# Altium PCB PCB1.pcbdoc
Units mil, origin at the board's own origin, x right, y up, seen from the top; angles counter-clockwise.
Board outline 2531.19 x 3324.76 mil, 2 copper layers (Top Layer, Bottom Layer); 18 components, 4 nets, 52 pads, 8 vias.
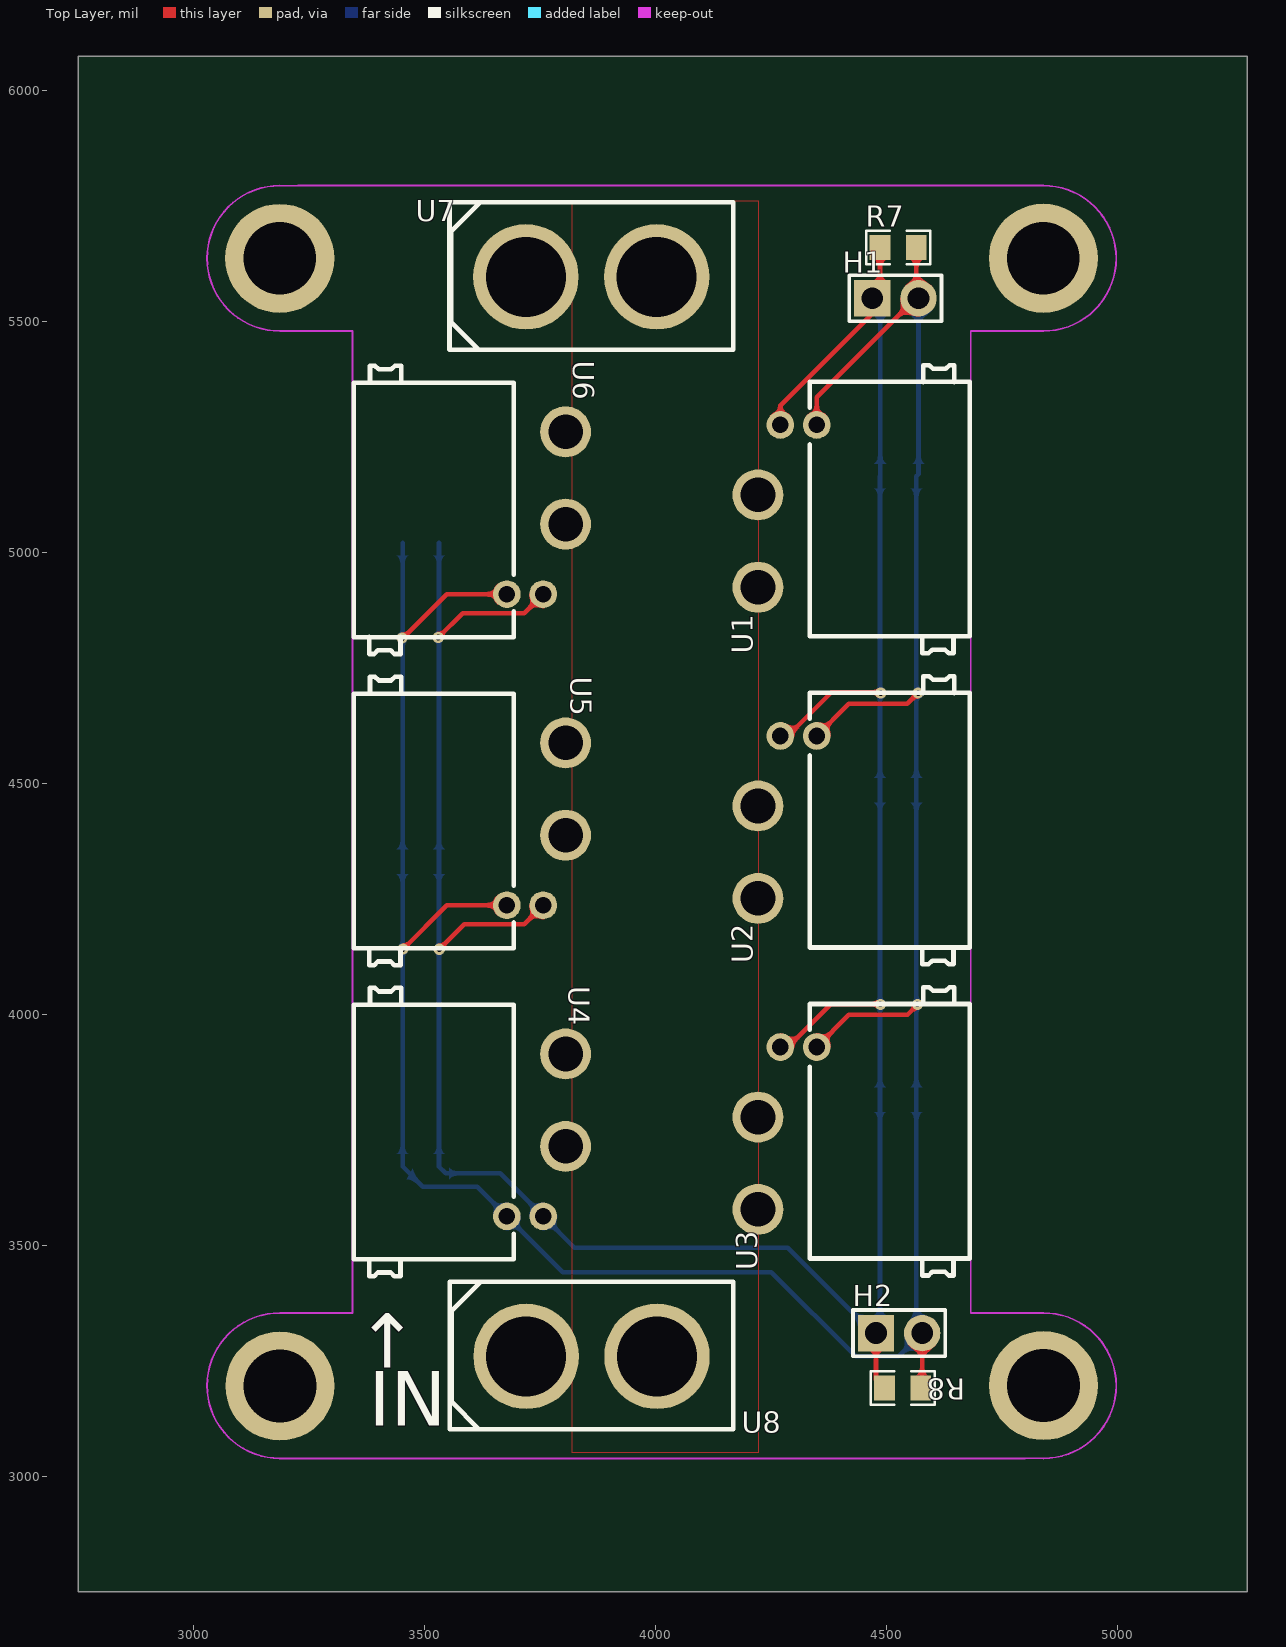
[diagram p0: Top Layer view]
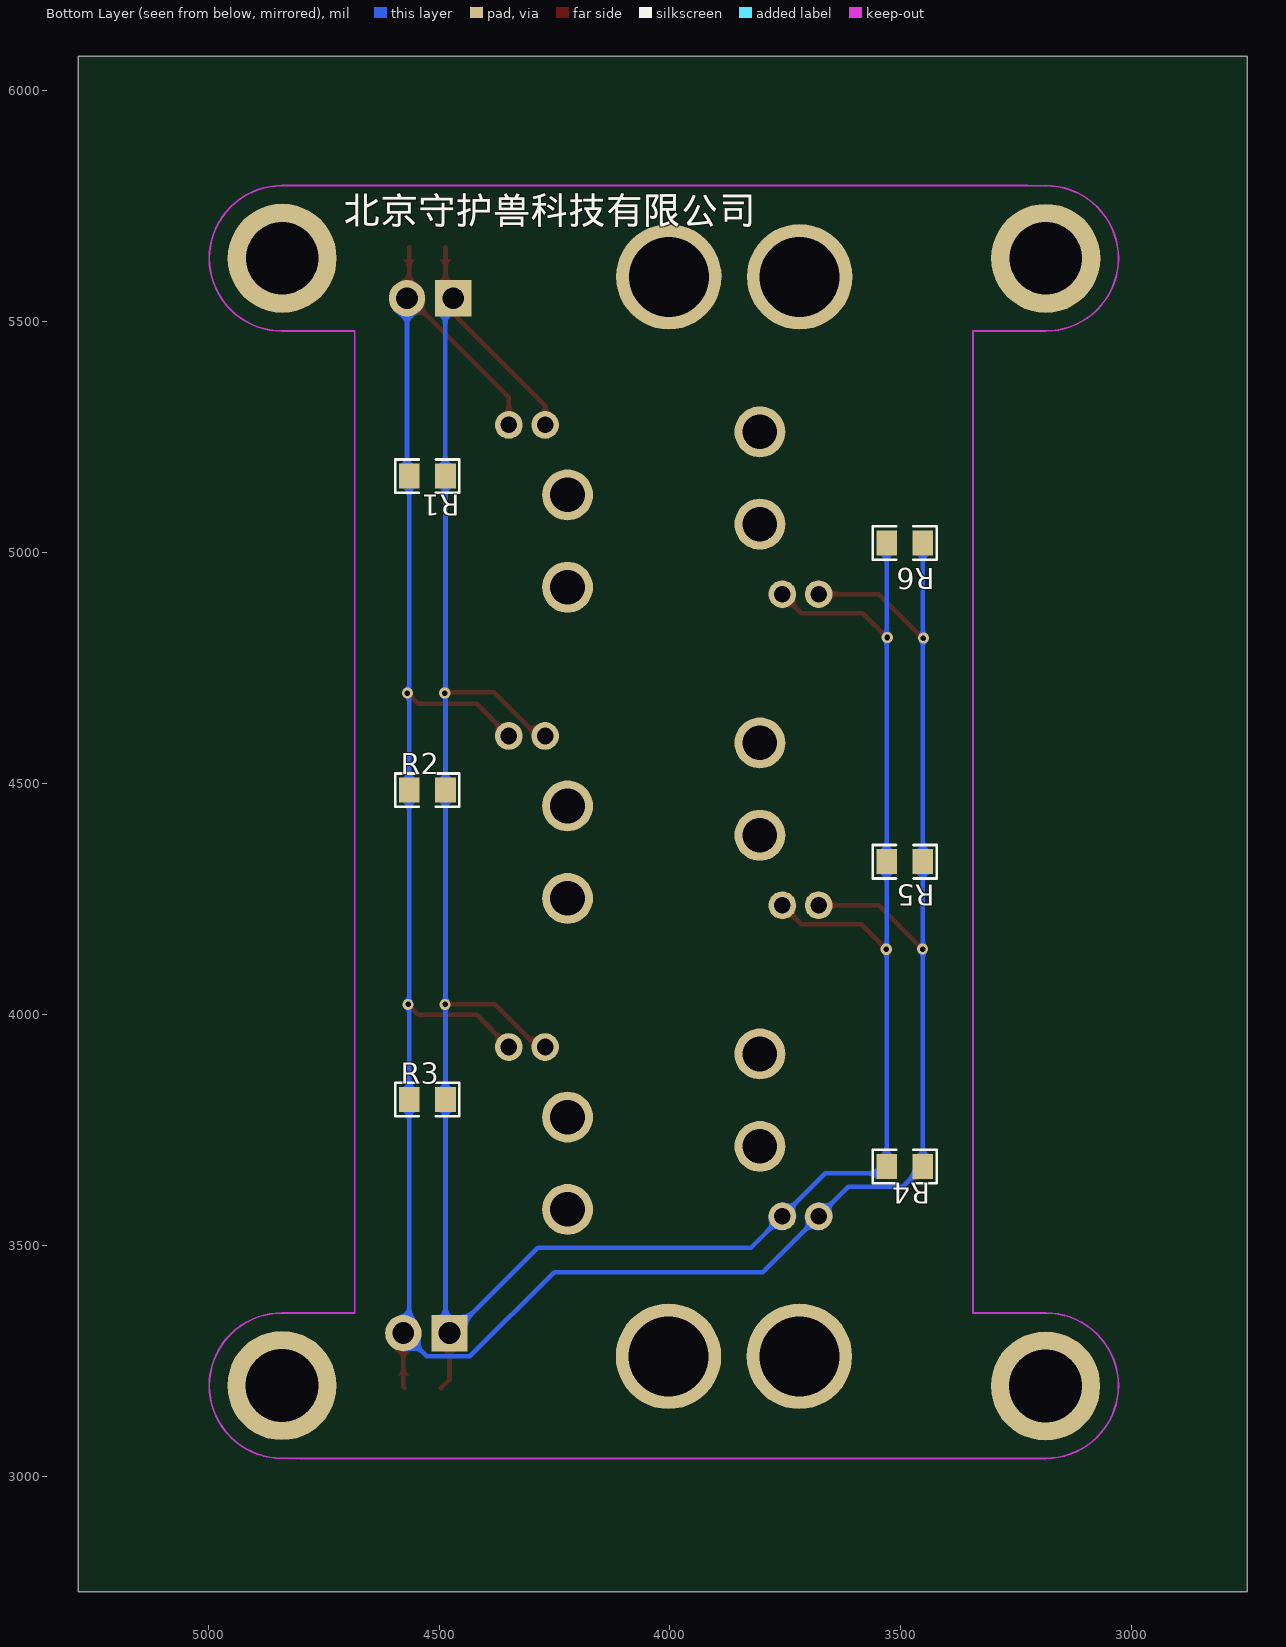
[diagram p1: Bottom Layer view, seen from below]

## Layer stack, top to bottom
Top Layer: signal copper (thickness not stored)
Dielectric: dielectric 12.6, FR-4, Dk 4.8
Bottom Layer: signal copper (thickness not stored)

## Board outline
5281.19,2750 2750,2750 2750,6074.76 5281.19,6074.76

## Design rules (kind name [scope] priority, off if disabled: settings)
Clearance copperThickness1oz [All] p1: gap=7 ignorepadtopadclearanceinfootprint=FALSE except(4: Track-Track; 6: Track-SMDPad SMDPad-SMDPad Track-THPad SMDPad-THPad THPad-THPad Track-Via SMDPad-Via THPad-Via Via-Via Track-Fill SMDPad-Fill THPad-Fill Via-Fill Fill-Fill SMDPad-Region THPad-Region Via-Region Fill-Region Region-Region Track-Poly SMDPad-Poly THPad-Poly Via-Poly Fill-Poly Poly-Poly Track-Text SMDPad-Text THPad-Text Via-Text Fill-Text Region-Text Poly-Text Text-Text Track-Sheet SMDPad-Sheet THPad-Sheet Via-Sheet Fill-Sheet Region-Sheet Poly-Sheet Text-Sheet Track-Hole SMDPad-Hole THPad-Hole Via-Hole Fill-Hole Region-Hole Poly-Hole Text-Hole Sheet-Hole; 11.8: Track-Region Region-Poly)
Clearance copperThickness2oz [All] p1: gap=7 ignorepadtopadclearanceinfootprint=FALSE except(6: Track-SMDPad SMDPad-SMDPad Track-THPad SMDPad-THPad THPad-THPad Track-Via SMDPad-Via THPad-Via Via-Via Track-Fill SMDPad-Fill THPad-Fill Via-Fill Fill-Fill SMDPad-Region THPad-Region Via-Region Fill-Region Region-Region Track-Poly SMDPad-Poly THPad-Poly Via-Poly Fill-Poly Poly-Poly Track-Text SMDPad-Text THPad-Text Via-Text Fill-Text Region-Text Poly-Text Text-Text Track-Sheet SMDPad-Sheet THPad-Sheet Via-Sheet Fill-Sheet Region-Sheet Poly-Sheet Text-Sheet Track-Hole SMDPad-Hole THPad-Hole Via-Hole Fill-Hole Region-Hole Poly-Hole Text-Hole Sheet-Hole; 8: Track-Track; 11.8: Track-Region Region-Poly)
DiffPairsRouting differentialPair [All] p1: maxuncoupledlength=236.2205 maxlimit=5.9843 mostfreqgap=5.9843 toplayer_minwidth=5 toplayer_prefwidth=10 toplayer_maxwidth=100 bottomlayer_minwidth=5 bottomlayer_prefwidth=10 bottomlayer_maxwidth=100
PasteMaskExpansion pasteMaskExpansion [All] p1:
PlaneConnect innerPlane [All] p1: planeconnectstyle=Relief reliefexpansion=20 reliefentries=4 reliefconductorwidth=10 reliefairgap=10
PolygonConnect copperRegion [All] p1: connectstyle=Direct reliefentries=4 reliefconductorwidth=10 polygonreliefangle="90 Angle" airgapwidth=10
RoutingVias viaSize [All] p1: viastyle="Through Hole" holewidth=12.0078 minholewidth=11.811 maxholewidth=248.0314 width=24.0158 minwidth=19.685 maxwidth=393.7008
SolderMaskExpansion solderMaskExpansion [All] p1: useseparateexpansions=TRUE expansion=2.0079 expansionbottom=2.0079
Width copperThickness1oz [All] p1: maxlimit=157 minlimit=5 preferedwidth=10
Width copperThickness2oz [All] p1: maxlimit=157 minlimit=8 preferedwidth=10

## Components (designator, comment, footprint, x,y, rotation, side; value= is the part's Value field where it differs from the comment)
H1 "PZ254V-11-02P" HDR-TH_2P-P2.54-V-M 4519.33,5550.77 r0 top
H2 "PZ254V-11-02P" HDR-TH_2P-P2.54-V-M 4527.35,3309.93 r0 top
R1 "0805W8F1200T5E" R0805 4525.4,5165.77 r180 bottom
R2 "0805W8F1200T5E" R0805 4525.4,4485.77 r180 bottom
R3 "0805W8F1200T5E" R0805 4525.4,3815.76 r180 bottom
R4 "0805W8F1200T5E" R0805 3491.62,3670.76 r0 bottom
R5 "0805W8F1200T5E" R0805 3491.62,4330.77 r0 bottom
R6 "0805W8F1200T5E" R0805 3491.62,5020.77 r0 bottom
R7 "0805W8F1200T5E" R0805 4525.4,5660.77 r180 top
R8 "0805W8F1200T5E" R0805 4535.2,3191.16 r180 top
U1 "XT30PW(2+2)-M.G.B" CONN-TH_4P-XT30PW-M 4285.4,5100.77 r90 top
U2 "XT30PW(2+2)-M.G.B" CONN-TH_4P-XT30PW-M 4285.4,4427.18 r90 top
U3 "XT30PW(2+2)-M.G.B" CONN-TH_4P-XT30PW-M 4285.4,3753.6 r90 top
U4 "XT30PW(2+2)-M.G.B" CONN-TH_4P-XT30PW-M 3741.62,3738.6 r270 top
U5 "XT30PW(2+2)-M.G.B" CONN-TH_4P-XT30PW-M 3741.62,4412.18 r270 top
U6 "XT30PW(2+2)-M.G.B" CONN-TH_4P-XT30PW-M 3741.62,5085.77 r270 top
U7 "XT60" CONN-TH_XT60 3860.86,5597.09 r0 top
U8 "XT60" CONN-TH_XT60 3861.44,3259.64 r0 top

## Footprints (in the part's own frame and the unit in brackets; to place one, negate y for a bottom-side part, rotate by r counter-clockwise, add the part's x,y. Pads: shape width x height; smd on the part's side, far side on the other; paste and mask are expansions set on the pad)
CONN-TH_4P-XT30PW-M [mil]
  round 110.24 hole 74.8: 1(-175.79,63.59) 2(24.21,63.59)
  round 60 hole 36: 3(175.79,15.15) 4(175.79,-63.59)
  silkscreen extent -319,-395 305,-49
CONN-TH_XT60 [mm]
  round 5.8 hole 4.4: 1(-3.6,0) 2(3.6,0)
  silkscreen extent -7.8,-4 7.8,4.1
HDR-TH_2P-P2.54-V-M [mm]
  rect 2x2 hole 1.2: 1(-1.27,0)
  round 2 hole 1.2: 2(1.27,0)
  silkscreen extent -2.54,-1.27 2.54,1.27
R0805 [mm]
  rect 1.133x1.377 smd: 1(-1,0) 2(1,0)
  silkscreen extent -1.76,-0.92 1.76,0.92

## Free pads (board coordinates)
  round 236.22 hole 157.48: 5(3186.29,5637.11) 5(3186.71,3195.41) 5(4839.69,5637.33) 5(4840.11,3196.43)

## Via types
v1: diameter 24.02, hole 12.01, Top Layer to Bottom Layer, 8 vias

## Nets (pads, with @x,y where several pads share a name; then routed paths per layer and width w, separated by ;. In a path a pad name is that pad's centre, name@x,y a point inside that pad or via, vN(x,y) a via of type N, cw(c..) or ccw(c..) an arc to the next point about the centre after c; other vN are vias at no path point)
CANH: 
CANL: H1.1 H2.1 R1.2 R2.2 R3.2 R4.2 R5.2 R6.2 R7.2 R8.2 U1.3 U2.3 U3.3 U4.3 U5.3 U6.3 | length 6340.7
  Top Layer w10: v1(3529.45,4816.22) 3582.2,4868.97 3715.77,4868.97 U6.3 ; v1(3531.65,4141.17) 3585.87,4195.39 3715.77,4195.39 U5.3 ; U3.3 4286.46,3929.39 4379.51,4022.44 4486.28,4022.44 v1(4486.75,4021.96) ; U2.3 4286.46,4602.97 4380.93,4697.44 4485.87,4697.44 v1(4487.55,4695.76) ; U1.3 4270.24,5318.46 4469.33,5517.55 H1.1 4486.03,5567.46 R7.2 ; H2.1 4477.35,3209.64 R8.2
  Bottom Layer w10: R6.2 R5.2 R4.2 3545.77,3655.98 3663.6,3655.98 U4.3 3824.49,3495.09 4286.03,3495.09 4471.19,3309.93 H2.1 4486.03,3318.6 R3.2 R2.2 R1.2 4486.54,5166.28 4486.54,5533.56 H1.1
GND: U1.2 U2.2 U3.2 U4.2 U5.2 U6.2 U7.1 U8.1
VCC: U1.1 U2.1 U3.1 U4.1 U5.1 U6.1 U7.2 U8.2
pads on no net: H1.2 H2.2 R1.1 R2.1 R3.1 R4.1 R5.1 R6.1 R7.1 R8.1 U1.4 U2.4 U3.4 U4.4 U5.4 U6.4
copper on no net: | length 6560.7
  Top Layer w10: v1(3451.19,4814.7) 3452.19,4814.7 3547.47,4909.97 3678.03,4909.97 ; v1(3453.09,4141.48) 3548.11,4236.49 3677.93,4236.49 3678.03,4236.39 ; 4348.98,3929.39 4418.55,3998.96 4545.63,3998.96 4567.14,4020.47 v1(4567.14,4021.96) ; 4348.98,4602.97 4418.76,4672.75 4545.39,4672.75 v1(4568.4,4695.76) ; 4348.98,5276.56 4348.98,5336.12 4563.63,5550.77 4569.33,5550.77 4564.77,5555.33 4564.77,5660.77 ; 4574.57,3191.16 4577.35,3193.94 4577.35,3309.93
  Bottom Layer w10: 3452.25,5020.77 3452.25,4330.77 3452.25,3670.76 3496.1,3626.91 3613.93,3626.91 3678.03,3562.81 3798.73,3442.11 4250.9,3442.11 4433.43,3259.58 4527,3259.58 4577.35,3309.93 4564.77,3322.52 4564.77,3815.76 4564.77,4485.77 4564.77,5165.77 4569.33,5170.33 4569.33,5550.77

## Polygon pours and split planes (outlines as drawn)
GND on Top Layer (solid, remove dead copper, pour order 14): 3818.26,3051.89 4223.57,3051.89 4223.57,5760.29 3818.26,5760.29
GND on Top Layer (solid, remove dead copper, pour order 16): 3008.22,3000 5027.08,3000 5027.08,5820.64 3008.22,5820.64
GND on Bottom Layer (solid, remove dead copper, pour order 22): 3000,3024.67 5031.19,3024.67 5031.19,5824.76 3000,5824.76
VCC on Bottom Layer (solid, remove dead copper, pour order 18): 3887.06,5597.4 3887.58,5597.4 3887.58,5597.93
VCC on Bottom Layer (solid, remove dead copper, pour order 20): 3887.58,5597.93 3887.58,5611.59 3889.77,5613.78 3889.77,5600.11
VCC on Top Layer (solid, remove dead copper): 3887.58,5726.54 4118.47,5726.54 4118.47,3133.74 3887.58,3133.74
VCC on Top Layer (solid, remove dead copper, pour order 2): 4096.23,3631.66 4222.02,3631.66 4223.2,3632.84 4223.2,3523.23 4221.98,3522.01 4096.23,3522.01 4095.92,3522.31 4096.23,3522.31
VCC on Top Layer (solid, remove dead copper, pour order 4): 3747.49,3972.21 3930.05,3969.26 3931.23,3970.44 3931.23,3860.83 3930.02,3859.61 3808.28,3859.45 3805.88,3859.45 3748.28,3861.06
VCC on Top Layer (solid, remove dead copper, pour order 6): 4102.28,4306.33 4222.17,4307.12 4272.53,4306.25 4275.18,4196.03 4228.03,4196.68 4102.28,4196.68 4101.98,4196.98 4102.28,4196.98
VCC on Top Layer (solid, remove dead copper, pour order 8): 3745.54,4642.37 3929.03,4642.37 3930.21,4643.55 3930.21,4533.93 3928.99,4532.72 3745.54,4532.81
VCC on Top Layer (solid, remove dead copper, pour order 10): 4104.34,4979.44 4277.96,4978.83 4279.57,4869.46 4230.09,4869.78 4104.34,4869.78 4104.03,4870.09 4104.34,4870.09
VCC on Top Layer (solid, remove dead copper, pour order 12): 3755.74,5318.75 3925.94,5318.56 3927.12,5319.74 3927.12,5210.13 3925.91,5208.91 3755.74,5208.53

## Keep-outs
Board Outline Layer:
  lines w3.94: 3185.32,3038.69 3225.74,3038.83 3422.59,3038.83 4603.69,3038.83 4800.54,3038.83 4840.41,3038.86 ; 3185.39,5794.47 3225.74,5794.73 3422.59,5794.73 4603.69,5794.73 4800.54,5794.73 4840.41,5794.86 ; 3186.37,3038.83 cw(c3186.37,3196.31) 3186.37,3353.79 3343.85,3353.79 3343.85,5479.77 3186.37,5479.77 cw(c3186.37,5637.25) 3186.37,5794.73 ; 3225.74,5479.94 3225.74,5480.03 ; 4839.91,3038.83 ccw(c4839.91,3196.31) 4839.91,3353.79 4682.43,3353.79 4682.43,5479.77 4839.91,5479.77 ccw(c4839.91,5637.25) 4839.91,5794.73

## Other copper
Top Layer:
  region net CANL: 4491.03,5605.14 4481.03,5605.14 cw(c4462.28,5605.14) 4473.53,5590.14 4498.53,5590.14 cw(c4509.78,5605.14)
  region: 4525.05,5519.25 4532.12,5512.18 4532.48,5512.53 4532.87,5512.85 4533.28,5513.15 4533.7,5513.42 4534.14,5513.68 4534.6,5513.91 4535.57,5514.31 4536.6,5514.64 4537.69,5514.89 4538.83,5515.08 4540.02,5515.19 4541.89,5515.27 4543.84,5515.22 4546.56,5515.01 4550.78,5514.44 4562.8,5512.26 4566.7,5511.69 4569.09,5511.48 4570.76,5511.44 4571.8,5511.47 4530.04,5553.23 4529.95,5550.42 4530.03,5547.14 4530.39,5542.94 4531.19,5536.03 4531.31,5534.07 4531.31,5532.63 4531.23,5531.21 4531.12,5530.27 4530.96,5529.34 4530.75,5528.41 4530.47,5527.47 4530.13,5526.54 4529.72,5525.6 4529.24,5524.66 4528.68,5523.7 4528.03,5522.74 4527.3,5521.76 4526.02,5520.27
  region: 4569.77,5604.36 4559.77,5604.36 4559.7,5602.33 4559.51,5600.47 4559.32,5599.31 4559.07,5598.22 4558.78,5597.19 4558.44,5596.21 4558.05,5595.28 4557.62,5594.4 4557.15,5593.57 4556.63,5592.77 4556.08,5592 4555.19,5590.9 4554.22,5589.85 4552.81,5588.5 4548.86,5585.17 4544.45,5581.46 4542.14,5579.28 4540.27,5577.33 4539.81,5576.81 4598.86,5576.81 4598.14,5577.58 4596.91,5578.74 4595.03,5580.3 4591.82,5582.65 4581.59,5589.55 4578.13,5592.12 4576.02,5593.87 4574.58,5595.21 4573.29,5596.58 4572.52,5597.51 4571.83,5598.44 4571.23,5599.4 4570.72,5600.36 4570.31,5601.34 4570.15,5601.84 4570.01,5602.33 4569.91,5602.84 4569.83,5603.34 4569.78,5603.85
  region net CANL: 4310.77,4620.21 4303.7,4627.28 4303.33,4626.93 4302.95,4626.61 4302.55,4626.33 4302.14,4626.07 4301.73,4625.84 4301.3,4625.64 4300.86,4625.47 4300.4,4625.32 4299.94,4625.2 4299.47,4625.11 4298.5,4624.98 4297.49,4624.94 4296.45,4624.99 4295.37,4625.11 4294.27,4625.29 4292.57,4625.68 4290.24,4626.38 4286,4627.92 4278.01,4631.02 4275.61,4631.81 4273.85,4632.29 4272.14,4632.66 4271.02,4632.82 4269.94,4632.92 4268.88,4632.93 4268.36,4632.91 4300.18,4601.09 4300.32,4602.42 4300.56,4603.74 4300.9,4605.05 4301.32,4606.36 4301.83,4607.65 4302.72,4609.56 4303.76,4611.42 4304.93,4613.23 4306.62,4615.54 4308.43,4617.72 4310.3,4619.73
  region: 4381.4,4628.32 4374.33,4635.39 4373.04,4634.18 4372.21,4633.5 4371.41,4632.9 4370.62,4632.38 4369.85,4631.95 4369.1,4631.59 4368.35,4631.29 4367.62,4631.07 4366.89,4630.9 4366.17,4630.79 4365.44,4630.73 4364.72,4630.71 4364,4630.74 4362.9,4630.84 4361.4,4631.09 4356.51,4632.16 4354.2,4632.58 4352.2,4632.83 4350.6,4632.94 4348.9,4632.98 4347.1,4632.91 4378.92,4601.09 4378.99,4602.89 4378.95,4604.59 4378.78,4606.71 4378.51,4608.67 4377.89,4611.8 4377.03,4615.77 4376.85,4616.89 4376.75,4617.99 4376.72,4618.71 4376.74,4619.43 4376.8,4620.16 4376.91,4620.88 4377.08,4621.61 4377.3,4622.34 4377.59,4623.09 4377.96,4623.84 4378.39,4624.61 4378.91,4625.4 4379.51,4626.2 4380.19,4627.03
  region net CANL: 4310.77,3946.62 4303.7,3953.69 4303.33,3953.35 4302.95,3953.03 4302.55,3952.74 4302.14,3952.49 4301.73,3952.26 4301.3,3952.06 4300.86,3951.89 4300.4,3951.74 4299.94,3951.62 4299.47,3951.52 4298.5,3951.4 4297.49,3951.36 4296.45,3951.4 4295.37,3951.52 4294.27,3951.71 4292.57,3952.1 4290.24,3952.79 4286,3954.34 4278.01,3957.44 4275.61,3958.23 4273.85,3958.71 4272.14,3959.07 4271.02,3959.24 4269.94,3959.33 4268.88,3959.35 4268.36,3959.33 4300.18,3927.51 4300.32,3928.83 4300.56,3930.15 4300.9,3931.47 4301.32,3932.77 4301.83,3934.07 4302.72,3935.97 4303.76,3937.84 4304.93,3939.65 4306.62,3941.96 4308.43,3944.13 4310.3,3946.15
  region: 4381.4,3954.73 4374.33,3961.8 4373.04,3960.6 4372.21,3959.91 4371.41,3959.31 4370.62,3958.8 4369.85,3958.36 4369.1,3958 4368.35,3957.71 4367.62,3957.48 4366.89,3957.31 4366.17,3957.2 4365.44,3957.14 4364.72,3957.13 4364,3957.15 4362.9,3957.26 4361.4,3957.5 4356.51,3958.57 4354.2,3958.99 4352.2,3959.24 4350.6,3959.36 4348.9,3959.39 4347.1,3959.33 4378.92,3927.51 4378.99,3929.31 4378.95,3931.01 4378.78,3933.12 4378.51,3935.09 4377.89,3938.22 4377.03,3942.19 4376.85,3943.31 4376.75,3944.4 4376.72,3945.13 4376.74,3945.85 4376.8,3946.57 4376.91,3947.3 4377.08,3948.02 4377.3,3948.76 4377.59,3949.5 4377.96,3950.26 4378.39,3951.03 4378.91,3951.81 4379.51,3952.62 4380.19,3953.45
  region net CANL: 3724.36,4211.04 3731.43,4203.97 3732.71,4205.18 3733.54,4205.87 3734.35,4206.46 3735.13,4206.98 3735.9,4207.41 3736.66,4207.78 3737.4,4208.07 3738.14,4208.3 3738.86,4208.46 3739.59,4208.58 3740.31,4208.64 3741.03,4208.65 3741.76,4208.62 3742.85,4208.52 3744.35,4208.27 3749.24,4207.21 3751.55,4206.79 3753.55,4206.53 3755.15,4206.42 3756.85,4206.39 3758.65,4206.45 3726.83,4238.27 3726.77,4236.47 3726.8,4234.77 3726.97,4232.65 3727.24,4230.69 3727.87,4227.56 3728.73,4223.59 3728.9,4222.47 3729.01,4221.37 3729.03,4220.65 3729.02,4219.93 3728.96,4219.21 3728.85,4218.48 3728.68,4217.75 3728.45,4217.02 3728.16,4216.28 3727.8,4215.52 3727.36,4214.75 3726.85,4213.96 3726.25,4213.16 3725.56,4212.33
  region: 3637.19,4241.49 3637.19,4231.49 3638.96,4231.43 3640.04,4231.33 3641.03,4231.19 3641.95,4230.99 3642.81,4230.76 3643.6,4230.48 3644.33,4230.15 3645.01,4229.79 3645.65,4229.39 3646.23,4228.96 3646.79,4228.49 3647.3,4227.99 3647.8,4227.45 3648.49,4226.6 3649.37,4225.36 3652.06,4221.12 3653.39,4219.18 3654.63,4217.58 3655.68,4216.36 3656.86,4215.13 3658.19,4213.89 3658.19,4258.89 3656.88,4257.67 3655.71,4256.45 3654.33,4254.85 3653.14,4253.27 3651.13,4250.27 3649.14,4247.24 3648.47,4246.33 3647.77,4245.48 3647.27,4244.95 3646.75,4244.46 3646.19,4243.99 3645.6,4243.56 3644.97,4243.17 3644.28,4242.81 3643.55,4242.49 3642.76,4242.22 3641.91,4241.98 3641,4241.79 3640.01,4241.65 3638.94,4241.55
  region net CANL: 4481.03,5618.66 4491.03,5618.66 cw(c4509.78,5618.66) 4498.53,5633.66 4473.53,5633.66 cw(c4462.28,5618.66)
  region: 4559.77,5618.66 4569.77,5618.66 cw(c4588.52,5618.66) 4577.27,5633.66 4552.27,5633.66 cw(c4541.02,5618.66)
  region net CANL: 3724.36,4884.63 3731.43,4877.56 3732.71,4878.76 3733.54,4879.45 3734.35,4880.05 3735.13,4880.56 3735.9,4881 3736.66,4881.36 3737.4,4881.65 3738.14,4881.88 3738.86,4882.05 3739.59,4882.16 3740.31,4882.22 3741.03,4882.24 3741.76,4882.21 3742.85,4882.1 3744.35,4881.86 3749.24,4880.79 3751.55,4880.37 3753.55,4880.12 3755.15,4880 3756.85,4879.97 3758.65,4880.03 3726.83,4911.85 3726.77,4910.05 3726.8,4908.35 3726.97,4906.24 3727.24,4904.28 3727.87,4901.15 3728.73,4897.17 3728.9,4896.06 3729.01,4894.96 3729.03,4894.23 3729.02,4893.51 3728.96,4892.79 3728.85,4892.07 3728.68,4891.34 3728.45,4890.6 3728.16,4889.86 3727.8,4889.1 3727.36,4888.33 3726.85,4887.55 3726.25,4886.74 3725.56,4885.91
  region: 3637.19,4914.97 3637.19,4904.97 3638.95,4904.92 3640.02,4904.82 3641.01,4904.67 3641.93,4904.48 3642.79,4904.24 3643.58,4903.96 3644.31,4903.64 3644.99,4903.29 3645.62,4902.89 3646.21,4902.46 3646.77,4901.99 3647.29,4901.49 3647.78,4900.96 3648.48,4900.11 3649.37,4898.88 3652.07,4894.66 3653.41,4892.73 3654.64,4891.14 3655.69,4889.93 3656.87,4888.7 3658.19,4887.47 3658.19,4932.47 3656.87,4931.24 3655.69,4930.02 3654.32,4928.41 3653.12,4926.82 3651.35,4924.17 3649.15,4920.75 3648.48,4919.84 3647.78,4918.99 3647.29,4918.46 3646.77,4917.96 3646.21,4917.49 3645.62,4917.06 3644.99,4916.66 3644.31,4916.3 3643.58,4915.98 3642.79,4915.7 3641.93,4915.47 3641.01,4915.28 3640.02,4915.13 3638.95,4915.03
  region net CANL: 4472.35,3255.56 4482.35,3255.56 cw(c4501.1,3255.56) 4489.85,3270.56 4464.85,3270.56 cw(c4453.6,3255.56)
  region: 4572.35,3256.33 4582.35,3256.33 4582.41,3257.21 4582.56,3258.09 4582.81,3258.99 4583.16,3259.89 4583.58,3260.8 4584.09,3261.72 4585.32,3263.57 4586.81,3265.43 4588.5,3267.29 4591.32,3270.07 4600.46,3277.95 4604.86,3281.82 4606.27,3283.23 4606.88,3283.89 4547.83,3283.89 4549.11,3282.54 4552.37,3279.56 4562.39,3270.98 4565.3,3268.22 4567.08,3266.36 4568.67,3264.5 4570.03,3262.64 4570.62,3261.72 4571.12,3260.8 4571.55,3259.89 4571.89,3258.99 4572.15,3258.09 4572.3,3257.21
  region: 4582.35,3233.27 4572.35,3233.27 cw(c4553.6,3233.27) 4564.85,3218.27 4589.85,3218.27 cw(c4601.1,3233.27)
  region: 3466.79,4822.22 3459.71,4829.29 3459.23,4828.85 3458.74,4828.47 3458.23,4828.14 3457.7,4827.86 3457.16,4827.62 3456.61,4827.42 3456.04,4827.26 3454.88,4827.02 3453.66,4826.88 3450.44,4826.68 3463.18,4813.95 3463.22,4814.43 3463.42,4815.48 3463.73,4816.61 3464.14,4817.78 3464.64,4818.93 3465.2,4820.02 3465.81,4821.02 3466.13,4821.46 3466.46,4821.87
  region net CANL: 3544.54,4824.24 3537.47,4831.32 3537.05,4830.93 3536.6,4830.58 3536.12,4830.25 3535.62,4829.95 3535.09,4829.68 3533.99,4829.22 3532.83,4828.86 3531.64,4828.58 3530.44,4828.38 3528.69,4828.21 3541.43,4815.47 3541.6,4817.22 3541.8,4818.41 3542.08,4819.6 3542.45,4820.76 3542.91,4821.87 3543.18,4822.4 3543.47,4822.9 3543.8,4823.38 3544.15,4823.83
  region: 3468.19,4149.5 3461.12,4156.57 3460.7,4156.19 3460.25,4155.83 3459.77,4155.51 3459.27,4155.21 3458.74,4154.94 3457.64,4154.48 3456.48,4154.11 3455.29,4153.83 3454.09,4153.63 3452.34,4153.46 3465.08,4140.72 3465.25,4142.47 3465.45,4143.67 3465.73,4144.86 3466.1,4146.02 3466.56,4147.12 3466.83,4147.65 3467.12,4148.15 3467.45,4148.63 3467.8,4149.08
  region net CANL: 3546.75,4149.2 3539.68,4156.27 3539.26,4155.88 3538.81,4155.53 3538.33,4155.2 3537.83,4154.9 3537.3,4154.63 3536.19,4154.17 3535.03,4153.81 3533.84,4153.53 3532.65,4153.33 3530.9,4153.16 3543.64,4140.42 3543.81,4142.17 3544.01,4143.36 3544.29,4144.55 3544.65,4145.71 3545.12,4146.82 3545.39,4147.35 3545.68,4147.85 3546.01,4148.33 3546.36,4148.78
  region net CANL: 4470.41,4027.44 4470.41,4017.44 4471.03,4017.41 4471.64,4017.34 4472.22,4017.22 4472.79,4017.05 4473.35,4016.85 4473.89,4016.61 4474.41,4016.34 4475.43,4015.71 4476.42,4014.99 4478.81,4012.96 4478.81,4030.97 4477.99,4030.31 4477.03,4029.67 4475.98,4029.08 4474.86,4028.54 4473.71,4028.09 4472.56,4027.74 4472,4027.61 4471.45,4027.52 4470.92,4027.46
  region: 4552.79,4013.19 4559.86,4006.12 4560.22,4006.46 4561.05,4007.13 4562.01,4007.78 4563.06,4008.38 4564.16,4008.92 4565.27,4009.38 4566.37,4009.72 4566.89,4009.84 4567.4,4009.93 4567.89,4009.98 4555.16,4022.72 4555.05,4019.36 4554.97,4018.13 4554.9,4017.54 4554.8,4016.96 4554.67,4016.39 4554.49,4015.83 4554.27,4015.28 4554,4014.75 4553.66,4014.22 4553.26,4013.7
  region net CANL: 4471.21,4702.44 4471.21,4692.44 4471.97,4692.41 4472.67,4692.32 4473.3,4692.16 4473.88,4691.95 4474.41,4691.7 4474.91,4691.39 4475.37,4691.05 4475.81,4690.66 4476.67,4689.8 4478.5,4687.81 4479.61,4686.75 4479.61,4704.76 4479.19,4704.42 4478.75,4704.12 4478.28,4703.84 4477.79,4703.6 4477.28,4703.38 4476.76,4703.19 4475.68,4702.89 4474.56,4702.67 4473.43,4702.54 4471.75,4702.45
  region: 4553.3,4687.73 4560.37,4680.66 4560.79,4681.05 4561.24,4681.4 4561.72,4681.73 4562.22,4682.03 4562.75,4682.29 4563.85,4682.76 4565.01,4683.12 4566.2,4683.4 4567.4,4683.6 4569.15,4683.77 4556.41,4696.51 4556.24,4694.76 4556.04,4693.57 4555.76,4692.38 4555.39,4691.22 4554.93,4690.11 4554.66,4689.58 4554.37,4689.08 4554.04,4688.6 4553.69,4688.15
  region: 4353.98,5317.4 4343.98,5317.4 4343.92,5315.64 4343.83,5314.57 4343.68,5313.57 4343.49,5312.65 4343.25,5311.8 4342.97,5311.01 4342.65,5310.28 4342.29,5309.6 4341.9,5308.97 4341.46,5308.37 4341,5307.82 4340.5,5307.3 4339.97,5306.81 4339.11,5306.11 4337.89,5305.22 4333.67,5302.52 4331.74,5301.18 4330.15,5299.94 4328.94,5298.89 4327.71,5297.72 4326.48,5296.4 4371.48,5296.4 4370.25,5297.72 4369.03,5298.89 4367.41,5300.27 4365.83,5301.46 4363.18,5303.24 4359.76,5305.44 4358.85,5306.11 4358,5306.81 4357.47,5307.3 4356.97,5307.82 4356.5,5308.37 4356.07,5308.97 4355.67,5309.6 4355.31,5310.28 4354.99,5311.01 4354.71,5311.8 4354.48,5312.65 4354.28,5313.57 4354.14,5314.57 4354.04,5315.64
  region net CANL: 4275.24,5317.4 4265.24,5317.4 4265.18,5315.64 4265.09,5314.57 4264.94,5313.57 4264.75,5312.65 4264.51,5311.8 4264.23,5311.01 4263.91,5310.28 4263.55,5309.6 4263.16,5308.97 4262.72,5308.37 4262.26,5307.82 4261.76,5307.3 4261.23,5306.81 4260.37,5306.11 4259.15,5305.22 4254.93,5302.52 4253,5301.18 4251.41,5299.94 4250.2,5298.89 4248.97,5297.72 4247.74,5296.4 4292.74,5296.4 4291.51,5297.72 4290.29,5298.89 4288.67,5300.27 4287.09,5301.46 4284.44,5303.24 4281.02,5305.44 4280.11,5306.11 4279.26,5306.81 4278.73,5307.3 4278.23,5307.82 4277.76,5308.37 4277.33,5308.97 4276.93,5309.6 4276.57,5310.28 4276.25,5311.01 4275.97,5311.8 4275.74,5312.65 4275.54,5313.57 4275.4,5314.57 4275.3,5315.64
Bottom Layer:
  region net CANL: 4481.54,5496.4 4491.54,5496.4 cw(c4510.29,5496.4) 4499.04,5511.4 4474.04,5511.4 cw(c4462.79,5496.4)
  region: 4564.33,5497.17 4574.33,5497.17 4574.39,5498.04 4574.54,5498.93 4574.79,5499.82 4575.14,5500.73 4575.56,5501.64 4576.07,5502.56 4577.3,5504.4 4578.79,5506.26 4580.48,5508.13 4583.3,5510.9 4592.44,5518.79 4596.84,5522.66 4598.25,5524.06 4598.86,5524.72 4539.81,5524.72 4541.09,5523.37 4544.35,5520.39 4554.37,5511.81 4557.28,5509.05 4559.06,5507.2 4560.65,5505.33 4562.01,5503.48 4562.6,5502.56 4563.1,5501.64 4563.53,5500.73 4563.87,5499.82 4564.13,5498.93 4564.28,5498.04
  region net CANL: 4481.03,5123.66 4491.03,5123.66 cw(c4509.78,5123.66) 4498.53,5138.66 4473.53,5138.66 cw(c4462.28,5123.66)
  region net CANL: 4491.54,5207.87 4481.54,5207.87 cw(c4462.79,5207.87) 4474.04,5192.87 4499.04,5192.87 cw(c4510.29,5207.87)
  region: 4559.77,5123.66 4569.77,5123.66 cw(c4588.52,5123.66) 4577.27,5138.66 4552.27,5138.66 cw(c4541.02,5123.66)
  region: 4574.33,5207.87 4564.33,5207.87 cw(c4545.58,5207.87) 4556.83,5192.87 4581.83,5192.87 cw(c4593.08,5207.87)
  region net CANL: 4481.03,4443.66 4491.03,4443.66 cw(c4509.78,4443.66) 4498.53,4458.66 4473.53,4458.66 cw(c4462.28,4443.66)
  region net CANL: 4491.03,4527.87 4481.03,4527.87 cw(c4462.28,4527.87) 4473.53,4512.87 4498.53,4512.87 cw(c4509.78,4527.87)
  region: 4569.77,4527.87 4559.77,4527.87 cw(c4541.02,4527.87) 4552.27,4512.87 4577.27,4512.87 cw(c4588.52,4527.87)
  region: 4559.77,4443.66 4569.77,4443.66 cw(c4588.52,4443.66) 4577.27,4458.66 4552.27,4458.66 cw(c4541.02,4443.66)
  region net CANL: 4491.03,3857.87 4481.03,3857.87 cw(c4462.28,3857.87) 4473.53,3842.87 4498.53,3842.87 cw(c4509.78,3857.87)
  region net CANL: 4481.03,3773.66 4491.03,3773.66 cw(c4509.78,3773.66) 4498.53,3788.66 4473.53,3788.66 cw(c4462.28,3773.66)
  region: 4559.77,3773.66 4569.77,3773.66 cw(c4588.52,3773.66) 4577.27,3788.66 4552.27,3788.66 cw(c4541.02,3773.66)
  region: 4569.77,3857.87 4559.77,3857.87 cw(c4541.02,3857.87) 4552.27,3842.87 4577.27,3842.87 cw(c4588.52,3857.87)
  region net CANL: 3535.99,3712.87 3525.99,3712.87 cw(c3507.24,3712.87) 3518.49,3697.87 3543.49,3697.87 cw(c3554.74,3712.87)
  region net CANL: 3568.28,3650.98 3568.28,3660.98 cw(c3568.28,3679.73) 3553.28,3668.48 3553.28,3643.68 cw(c3568.28,3631.93)
  region: 3457.25,3712.87 3447.25,3712.87 cw(c3428.5,3712.87) 3439.75,3697.87 3464.75,3697.87 cw(c3476,3712.87)
  region: 3482.89,3633.05 3485.15,3644.94 cw(c3511.66,3671.45) 3474.54,3666.15 3461.68,3643.66 cw(c3456.37,3606.54)
  region net CANL: 3535.99,4372.87 3525.99,4372.87 cw(c3507.24,4372.87) 3518.49,4357.87 3543.49,4357.87 cw(c3554.74,4372.87)
  region net CANL: 3525.99,4288.66 3535.99,4288.66 cw(c3554.74,4288.66) 3543.49,4303.66 3518.49,4303.66 cw(c3507.24,4288.66)
  region: 3457.25,4372.87 3447.25,4372.87 cw(c3428.5,4372.87) 3439.75,4357.87 3464.75,4357.87 cw(c3476,4372.87)
  region: 3447.25,4288.66 3457.25,4288.66 cw(c3476,4288.66) 3464.75,4303.66 3439.75,4303.66 cw(c3428.5,4288.66)
  region net CANL: 3525.99,4978.66 3535.99,4978.66 cw(c3554.74,4978.66) 3543.49,4993.66 3518.49,4993.66 cw(c3507.24,4978.66)
  region: 3447.25,4978.66 3457.25,4978.66 cw(c3476,4978.66) 3464.75,4993.66 3439.75,4993.66 cw(c3428.5,4978.66)
  region net CANL: 4428.28,3359.91 4427.38,3346.67 cw(c4400.86,3320.15) 4437.98,3325.46 4449.5,3349.3 cw(c4454.8,3386.42)
  region net CANL: 4491.03,3364.3 4481.03,3364.3 cw(c4462.28,3364.3) 4473.53,3349.3 4498.53,3349.3 cw(c4509.78,3364.3)
  region: 4535.92,3275.57 4542.99,3268.5 4543.64,3269.08 4544.38,3269.59 4545.19,3270.05 4546.07,3270.45 4547.02,3270.79 4548.03,3271.08 4550.21,3271.51 4552.57,3271.78 4555.08,3271.9 4559.04,3271.86 4571.08,3270.98 4576.93,3270.61 4578.92,3270.6 4579.82,3270.64 4538.06,3312.4 4538.01,3310.53 4538.21,3306.12 4539.23,3292.97 4539.34,3288.96 4539.28,3286.39 4539.09,3283.95 4538.74,3281.67 4538.5,3280.61 4538.21,3279.6 4537.87,3278.65 4537.47,3277.77 4537.02,3276.96 4536.5,3276.22
  region: 4569.77,3363.53 4559.77,3363.53 4559.7,3361.81 4559.5,3360.03 4559.18,3358.22 4558.74,3356.37 4557.89,3353.57 4556.84,3350.76 4555.61,3347.99 4554.23,3345.29 4552.73,3342.7 4551.14,3340.26 4549.5,3338 4547.83,3335.97 4606.88,3335.97 4605.96,3336.94 4604.93,3337.86 4603.82,3338.75 4601.99,3340.02 4600.01,3341.22 4596.43,3343.11 4584.84,3348.44 4580.44,3350.65 4577.75,3352.22 4575.91,3353.47 4574.79,3354.34 4573.76,3355.24 4572.82,3356.19 4572,3357.18 4571.63,3357.69 4571.29,3358.22 4570.98,3358.75 4570.7,3359.3 4570.46,3359.86 4570.25,3360.44 4570.08,3361.03 4569.95,3361.63 4569.85,3362.25 4569.79,3362.88
  region: 3447.25,4798.35 3457.25,4798.35 3457.26,4798.84 3457.38,4799.9 3457.59,4801.04 3457.91,4802.21 3458.3,4803.37 3458.77,4804.48 3459.3,4805.49 3459.59,4805.95 3459.89,4806.38 3460.2,4806.76 3442.19,4806.76 3444.48,4804.31 3445.3,4803.38 3445.67,4802.91 3446.01,4802.43 3446.31,4801.93 3446.58,4801.42 3446.81,4800.87 3447,4800.3 3447.13,4799.69 3447.22,4799.04
  region: 3457.25,4831.05 3447.25,4831.05 3447.22,4830.35 3447.13,4829.7 3447,4829.1 3446.81,4828.52 3446.58,4827.98 3446.31,4827.46 3446.01,4826.97 3445.67,4826.48 3444.9,4825.55 3442.66,4823.17 3442.19,4822.64 3460.2,4822.64 3459.89,4823.02 3459.59,4823.44 3459.3,4823.9 3458.77,4824.92 3458.3,4826.03 3457.91,4827.19 3457.59,4828.36 3457.38,4829.49 3457.26,4830.56
  region net CANL: 3525.99,4799.87 3535.99,4799.87 3536.02,4800.95 3536.11,4802.07 3536.28,4803.21 3536.52,4804.34 3536.86,4805.43 3537.06,4805.96 3537.28,4806.47 3537.53,4806.96 3537.81,4807.43 3538.12,4807.87 3538.45,4808.28 3520.44,4808.28 3521.47,4807.19 3523.41,4805.34 3524.25,4804.47 3524.63,4804.02 3524.96,4803.55 3525.26,4803.05 3525.51,4802.51 3525.71,4801.94 3525.86,4801.31 3525.96,4800.62
  region net CANL: 3535.99,4832.57 3525.99,4832.57 3525.96,4831.82 3525.86,4831.13 3525.71,4830.51 3525.51,4829.93 3525.26,4829.39 3524.96,4828.9 3524.63,4828.42 3524.25,4827.97 3523.41,4827.1 3521.47,4825.26 3520.44,4824.16 3538.45,4824.16 3538.12,4824.57 3537.81,4825.01 3537.53,4825.48 3537.28,4825.97 3537.06,4826.48 3536.68,4827.55 3536.39,4828.66 3536.18,4829.8 3536.06,4830.93 3535.99,4832.04
  region: 3447.25,4125.13 3457.25,4125.13 3457.27,4125.8 3457.36,4126.43 3457.49,4127.03 3457.66,4127.6 3457.88,4128.15 3458.14,4128.67 3458.44,4129.18 3459.12,4130.16 3459.9,4131.1 3462.1,4133.53 3444.09,4133.53 3444.68,4132.75 3445.26,4131.8 3445.79,4130.71 3446.27,4129.56 3446.67,4128.37 3446.98,4127.2 3447.18,4126.11
  region: 3457.25,4157.82 3447.25,4157.82 3447.18,4156.84 3446.98,4155.75 3446.67,4154.58 3446.27,4153.4 3445.79,4152.24 3445.26,4151.16 3444.68,4150.2 3444.09,4149.42 3462.1,4149.42 3459.9,4151.85 3459.12,4152.79 3458.44,4153.77 3458.14,4154.28 3457.88,4154.8 3457.66,4155.35 3457.49,4155.92 3457.36,4156.52 3457.27,4157.16
  region net CANL: 3525.99,4124.82 3535.99,4124.82 3536.01,4125.47 3536.09,4126.09 3536.22,4126.68 3536.39,4127.25 3536.6,4127.8 3536.85,4128.34 3537.13,4128.85 3537.79,4129.85 3538.54,4130.82 3540.66,4133.23 3522.65,4133.23 3522.96,4132.85 3523.58,4131.97 3524.16,4130.95 3524.7,4129.84 3525.17,4128.68 3525.55,4127.51 3525.82,4126.37 3525.91,4125.83 3525.97,4125.31
  region net CANL: 3535.99,4157.52 3525.99,4157.52 3525.97,4157.03 3525.91,4156.51 3525.7,4155.41 3525.37,4154.25 3524.94,4153.08 3524.44,4151.94 3523.87,4150.87 3523.27,4149.92 3522.96,4149.49 3522.65,4149.11 3540.66,4149.11 3538.54,4151.53 3537.79,4152.49 3537.13,4153.49 3536.85,4154.01 3536.6,4154.54 3536.39,4155.09 3536.22,4155.66 3536.09,4156.25 3536.01,4156.87
  region net CANL: 4481.03,4005.62 4491.03,4005.62 4491.05,4006.27 4491.13,4006.89 4491.26,4007.49 4491.43,4008.06 4491.65,4008.61 4491.9,4009.14 4492.19,4009.65 4492.85,4010.64 4493.61,4011.6 4495.76,4014.02 4477.75,4014.02 4478.06,4013.65 4478.36,4013.23 4478.95,4012.27 4479.51,4011.2 4480,4010.05 4480.42,4008.87 4480.74,4007.71 4480.95,4006.61 4481.01,4006.1
  region net CANL: 4491.03,4038.31 4481.03,4038.31 4480.95,4037.32 4480.74,4036.22 4480.42,4035.05 4480,4033.88 4479.51,4032.73 4478.95,4031.66 4478.36,4030.7 4477.75,4029.91 4495.76,4029.91 4493.61,4032.32 4492.85,4033.28 4492.19,4034.27 4491.9,4034.79 4491.65,4035.32 4491.43,4035.87 4491.26,4036.44 4491.13,4037.03 4491.05,4037.66
  region: 4559.77,4005.62 4569.77,4005.62 4569.8,4006.47 4569.91,4007.21 4570.08,4007.87 4570.31,4008.46 4570.6,4008.97 4570.94,4009.44 4571.33,4009.87 4571.76,4010.27 4573.25,4011.44 4574.37,4012.32 4575.55,4013.38 4576.15,4014.02 4558.13,4014.02 4558.51,4013.56 4558.83,4013.09 4559.09,4012.61 4559.3,4012.13 4559.47,4011.64 4559.6,4011.15 4559.7,4010.64 4559.76,4010.13 4559.82,4009.07 4559.77,4006.22
  region: 4569.77,4038.31 4559.77,4038.31 4559.82,4035.41 4559.8,4034.33 4559.76,4033.8 4559.7,4033.29 4559.6,4032.78 4559.47,4032.29 4559.3,4031.8 4559.09,4031.31 4558.83,4030.84 4558.51,4030.37 4558.13,4029.91 4576.15,4029.91 4575.55,4030.54 4574.37,4031.61 4572.23,4033.27 4571.76,4033.66 4571.33,4034.06 4570.94,4034.49 4570.6,4034.95 4570.31,4035.47 4570.08,4036.06 4569.91,4036.72 4569.8,4037.46
  region net CANL: 4481.03,4679.41 4491.03,4679.41 4491.06,4680.16 4491.15,4680.84 4491.3,4681.47 4491.5,4682.05 4491.75,4682.58 4492.05,4683.08 4492.38,4683.55 4492.76,4684 4493.59,4684.88 4495.53,4686.73 4496.56,4687.82 4478.55,4687.82 4478.88,4687.41 4479.19,4686.97 4479.46,4686.5 4479.72,4686.01 4479.94,4685.5 4480.32,4684.43 4480.62,4683.31 4480.82,4682.18 4480.96,4681.04 4481.02,4679.94
  region net CANL: 4491.03,4712.11 4481.03,4712.11 4481,4711.03 4480.9,4709.91 4480.73,4708.77 4480.48,4707.64 4480.15,4706.54 4479.94,4706.02 4479.72,4705.51 4479.46,4705.02 4479.19,4704.55 4478.88,4704.11 4478.55,4703.7 4496.56,4703.7 4495.53,4704.79 4493.59,4706.64 4492.76,4707.51 4492.38,4707.96 4492.05,4708.44 4491.75,4708.93 4491.5,4709.47 4491.3,4710.05 4491.15,4710.67 4491.06,4711.36
  region: 4559.77,4679.41 4569.77,4679.41 4569.83,4679.96 4570.02,4680.51 4570.31,4681.07 4570.69,4681.64 4571.15,4682.2 4572.26,4683.33 4574.78,4685.49 4576.53,4686.95 4577,4687.4 4577.4,4687.82 4559.39,4687.82 4559.83,4687.27 4560.16,4686.76 4560.4,4686.27 4560.56,4685.8 4560.65,4685.34 4560.67,4684.89 4560.64,4684.44 4560.57,4683.99 4560.21,4682.52 4559.96,4681.41 4559.86,4680.79 4559.79,4680.13
  region: 4569.77,4712.11 4559.77,4712.11 4559.79,4711.39 4559.86,4710.72 4560.08,4709.53 4560.47,4708 4560.57,4707.53 4560.64,4707.07 4560.67,4706.62 4560.65,4706.17 4560.56,4705.71 4560.4,4705.25 4560.16,4704.76 4559.83,4704.24 4559.39,4703.7 4577.4,4703.7 4577,4704.12 4575.99,4705.03 4572.87,4707.63 4571.68,4708.75 4571.15,4709.31 4570.69,4709.88 4570.31,4710.44 4570.02,4711 4569.83,4711.56
  region: 4559.77,4679.41 4569.77,4679.41 4569.83,4679.96 4570.02,4680.51 4570.31,4681.07 4570.69,4681.64 4571.15,4682.2 4572.26,4683.33 4574.78,4685.49 4576.53,4686.95 4577,4687.4 4577.4,4687.82 4559.39,4687.82 4559.83,4687.27 4560.16,4686.76 4560.4,4686.27 4560.56,4685.8 4560.65,4685.34 4560.67,4684.89 4560.64,4684.44 4560.57,4683.99 4560.21,4682.52 4559.96,4681.41 4559.86,4680.79 4559.79,4680.13
  region: 4569.77,4712.11 4559.77,4712.11 4559.79,4711.39 4559.86,4710.72 4560.08,4709.53 4560.47,4708 4560.57,4707.53 4560.64,4707.07 4560.67,4706.62 4560.65,4706.17 4560.56,4705.71 4560.4,4705.25 4560.16,4704.76 4559.83,4704.24 4559.39,4703.7 4577.4,4703.7 4577,4704.12 4575.99,4705.03 4572.87,4707.63 4571.68,4708.75 4571.15,4709.31 4570.69,4709.88 4570.31,4710.44 4570.02,4711 4569.83,4711.56
  region net CANL: 4481.03,4679.41 4491.03,4679.41 4491.06,4680.16 4491.15,4680.84 4491.3,4681.47 4491.5,4682.05 4491.75,4682.58 4492.05,4683.08 4492.38,4683.55 4492.76,4684 4493.59,4684.88 4495.53,4686.73 4496.56,4687.82 4478.55,4687.82 4478.88,4687.41 4479.19,4686.97 4479.46,4686.5 4479.72,4686.01 4479.94,4685.5 4480.32,4684.43 4480.62,4683.31 4480.82,4682.18 4480.96,4681.04 4481.02,4679.94
  region net CANL: 4491.03,4712.11 4481.03,4712.11 4481,4711.03 4480.9,4709.91 4480.73,4708.77 4480.48,4707.64 4480.15,4706.54 4479.94,4706.02 4479.72,4705.51 4479.46,4705.02 4479.19,4704.55 4478.88,4704.11 4478.55,4703.7 4496.56,4703.7 4495.53,4704.79 4493.59,4706.64 4492.76,4707.51 4492.38,4707.96 4492.05,4708.44 4491.75,4708.93 4491.5,4709.47 4491.3,4710.05 4491.15,4710.67 4491.06,4711.36
  region: 4559.77,4005.62 4569.77,4005.62 4569.8,4006.47 4569.91,4007.21 4570.08,4007.87 4570.31,4008.46 4570.6,4008.97 4570.94,4009.44 4571.33,4009.87 4571.76,4010.27 4573.25,4011.44 4574.37,4012.32 4575.55,4013.38 4576.15,4014.02 4558.13,4014.02 4558.51,4013.56 4558.83,4013.09 4559.09,4012.61 4559.3,4012.13 4559.47,4011.64 4559.6,4011.15 4559.7,4010.64 4559.76,4010.13 4559.82,4009.07 4559.77,4006.22
  region: 4569.77,4038.31 4559.77,4038.31 4559.82,4035.41 4559.8,4034.33 4559.76,4033.8 4559.7,4033.29 4559.6,4032.78 4559.47,4032.29 4559.3,4031.8 4559.09,4031.31 4558.83,4030.84 4558.51,4030.37 4558.13,4029.91 4576.15,4029.91 4575.55,4030.54 4574.37,4031.61 4572.23,4033.27 4571.76,4033.66 4571.33,4034.06 4570.94,4034.49 4570.6,4034.95 4570.31,4035.47 4570.08,4036.06 4569.91,4036.72 4569.8,4037.46
  region net CANL: 4481.03,4005.62 4491.03,4005.62 4491.05,4006.27 4491.13,4006.89 4491.26,4007.49 4491.43,4008.06 4491.65,4008.61 4491.9,4009.14 4492.19,4009.65 4492.85,4010.64 4493.61,4011.6 4495.76,4014.02 4477.75,4014.02 4478.06,4013.65 4478.36,4013.23 4478.95,4012.27 4479.51,4011.2 4480,4010.05 4480.42,4008.87 4480.74,4007.71 4480.95,4006.61 4481.01,4006.1
  region net CANL: 4491.03,4038.31 4481.03,4038.31 4480.95,4037.32 4480.74,4036.22 4480.42,4035.05 4480,4033.88 4479.51,4032.73 4478.95,4031.66 4478.36,4030.7 4477.75,4029.91 4495.76,4029.91 4493.61,4032.32 4492.85,4033.28 4492.19,4034.27 4491.9,4034.79 4491.65,4035.32 4491.43,4035.87 4491.26,4036.44 4491.13,4037.03 4491.05,4037.66
  region: 3447.25,4798.35 3457.25,4798.35 3457.26,4798.84 3457.38,4799.9 3457.59,4801.04 3457.91,4802.21 3458.3,4803.37 3458.77,4804.48 3459.3,4805.49 3459.59,4805.95 3459.89,4806.38 3460.2,4806.76 3442.19,4806.76 3444.48,4804.31 3445.3,4803.38 3445.67,4802.91 3446.01,4802.43 3446.31,4801.93 3446.58,4801.42 3446.81,4800.87 3447,4800.3 3447.13,4799.69 3447.22,4799.04
  region: 3457.25,4831.05 3447.25,4831.05 3447.22,4830.35 3447.13,4829.7 3447,4829.1 3446.81,4828.52 3446.58,4827.98 3446.31,4827.46 3446.01,4826.97 3445.67,4826.48 3444.9,4825.55 3442.66,4823.17 3442.19,4822.64 3460.2,4822.64 3459.89,4823.02 3459.59,4823.44 3459.3,4823.9 3458.77,4824.92 3458.3,4826.03 3457.91,4827.19 3457.59,4828.36 3457.38,4829.49 3457.26,4830.56
  region net CANL: 3525.99,4799.87 3535.99,4799.87 3536.02,4800.95 3536.11,4802.07 3536.28,4803.21 3536.52,4804.34 3536.86,4805.43 3537.06,4805.96 3537.28,4806.47 3537.53,4806.96 3537.81,4807.43 3538.12,4807.87 3538.45,4808.28 3520.44,4808.28 3521.47,4807.19 3523.41,4805.34 3524.25,4804.47 3524.63,4804.02 3524.96,4803.55 3525.26,4803.05 3525.51,4802.51 3525.71,4801.94 3525.86,4801.31 3525.96,4800.62
  region net CANL: 3535.99,4832.57 3525.99,4832.57 3525.96,4831.82 3525.86,4831.13 3525.71,4830.51 3525.51,4829.93 3525.26,4829.39 3524.96,4828.9 3524.63,4828.42 3524.25,4827.97 3523.41,4827.1 3521.47,4825.26 3520.44,4824.16 3538.45,4824.16 3538.12,4824.57 3537.81,4825.01 3537.53,4825.48 3537.28,4825.97 3537.06,4826.48 3536.68,4827.55 3536.39,4828.66 3536.18,4829.8 3536.06,4830.93 3535.99,4832.04
  region: 3447.25,4125.13 3457.25,4125.13 3457.27,4125.8 3457.36,4126.43 3457.49,4127.03 3457.66,4127.6 3457.88,4128.15 3458.14,4128.67 3458.44,4129.18 3459.12,4130.16 3459.9,4131.1 3462.1,4133.53 3444.09,4133.53 3444.68,4132.75 3445.26,4131.8 3445.79,4130.71 3446.27,4129.56 3446.67,4128.37 3446.98,4127.2 3447.18,4126.11
  region: 3457.25,4157.82 3447.25,4157.82 3447.18,4156.84 3446.98,4155.75 3446.67,4154.58 3446.27,4153.4 3445.79,4152.24 3445.26,4151.16 3444.68,4150.2 3444.09,4149.42 3462.1,4149.42 3459.9,4151.85 3459.12,4152.79 3458.44,4153.77 3458.14,4154.28 3457.88,4154.8 3457.66,4155.35 3457.49,4155.92 3457.36,4156.52 3457.27,4157.16
  region net CANL: 3525.99,4124.82 3535.99,4124.82 3536.01,4125.47 3536.09,4126.09 3536.22,4126.68 3536.39,4127.25 3536.6,4127.8 3536.85,4128.34 3537.13,4128.85 3537.79,4129.85 3538.54,4130.82 3540.66,4133.23 3522.65,4133.23 3522.96,4132.85 3523.58,4131.97 3524.16,4130.95 3524.7,4129.84 3525.17,4128.68 3525.55,4127.51 3525.82,4126.37 3525.91,4125.83 3525.97,4125.31
  region net CANL: 3535.99,4157.52 3525.99,4157.52 3525.97,4157.03 3525.91,4156.51 3525.7,4155.41 3525.37,4154.25 3524.94,4153.08 3524.44,4151.94 3523.87,4150.87 3523.27,4149.92 3522.96,4149.49 3522.65,4149.11 3540.66,4149.11 3538.54,4151.53 3537.79,4152.49 3537.13,4153.49 3536.85,4154.01 3536.6,4154.54 3536.39,4155.09 3536.22,4155.66 3536.09,4156.25 3536.01,4156.87
  region: 3703.38,3530.39 3710.45,3537.46 3709.24,3538.75 3708.56,3539.57 3707.96,3540.38 3707.44,3541.17 3707.01,3541.94 3706.65,3542.69 3706.35,3543.44 3706.13,3544.17 3705.96,3544.9 3705.85,3545.62 3705.79,3546.34 3705.77,3547.07 3705.8,3547.79 3705.9,3548.89 3706.15,3550.38 3707.22,3555.28 3707.64,3557.58 3707.89,3559.58 3708,3561.19 3708.04,3562.88 3707.97,3564.68 3676.15,3532.86 3677.95,3532.8 3679.65,3532.84 3681.77,3533 3683.73,3533.28 3686.86,3533.9 3690.83,3534.76 3691.95,3534.93 3693.05,3535.04 3693.77,3535.07 3694.49,3535.05 3695.22,3534.99 3695.94,3534.88 3696.67,3534.71 3697.4,3534.48 3698.15,3534.19 3698.9,3533.83 3699.67,3533.39 3700.46,3532.88 3701.26,3532.28 3702.09,3531.6
  region: 3652.69,3595.22 3645.62,3588.15 3646.82,3586.86 3647.51,3586.04 3648.11,3585.23 3648.62,3584.45 3649.06,3583.68 3649.42,3582.92 3649.71,3582.18 3649.94,3581.44 3650.11,3580.71 3650.22,3579.99 3650.28,3579.27 3650.29,3578.55 3650.27,3577.82 3650.16,3576.72 3649.92,3575.23 3648.85,3570.34 3648.43,3568.03 3648.18,3566.03 3648.06,3564.43 3648.03,3562.73 3648.09,3560.93 3679.91,3592.75 3678.11,3592.81 3676.41,3592.78 3674.3,3592.61 3672.33,3592.33 3669.2,3591.71 3665.23,3590.85 3664.11,3590.68 3663.02,3590.57 3662.29,3590.54 3661.57,3590.56 3660.85,3590.62 3660.12,3590.73 3659.4,3590.9 3658.66,3591.13 3657.92,3591.42 3657.16,3591.78 3656.39,3592.22 3655.61,3592.73 3654.8,3593.33 3653.97,3594.02
  region net CANL: 3782.12,3530.39 3789.19,3537.46 3787.98,3538.75 3787.3,3539.57 3786.7,3540.38 3786.18,3541.17 3785.75,3541.94 3785.39,3542.69 3785.09,3543.44 3784.87,3544.17 3784.7,3544.9 3784.59,3545.62 3784.53,3546.34 3784.51,3547.07 3784.54,3547.79 3784.64,3548.89 3784.89,3550.38 3785.96,3555.28 3786.38,3557.58 3786.63,3559.58 3786.74,3561.19 3786.78,3562.88 3786.71,3564.68 3754.89,3532.86 3756.7,3532.8 3758.39,3532.84 3760.51,3533 3762.47,3533.28 3765.6,3533.9 3769.57,3534.76 3770.69,3534.93 3771.79,3535.04 3772.51,3535.07 3773.23,3535.05 3773.96,3534.99 3774.68,3534.88 3775.41,3534.71 3776.14,3534.48 3776.89,3534.19 3777.64,3533.83 3778.41,3533.39 3779.2,3532.88 3780,3532.28 3780.83,3531.6
  region net CANL: 3731.43,3595.22 3724.36,3588.15 3725.56,3586.86 3726.25,3586.04 3726.85,3585.23 3727.36,3584.45 3727.8,3583.68 3728.16,3582.92 3728.45,3582.18 3728.68,3581.44 3728.85,3580.71 3728.96,3579.99 3729.02,3579.27 3729.03,3578.55 3729.01,3577.82 3728.9,3576.72 3728.66,3575.23 3727.59,3570.34 3727.17,3568.03 3726.92,3566.03 3726.8,3564.43 3726.77,3562.73 3726.83,3560.93 3758.65,3592.75 3756.85,3592.81 3755.15,3592.78 3753.04,3592.61 3751.07,3592.33 3747.94,3591.71 3743.97,3590.85 3742.85,3590.68 3741.76,3590.57 3741.03,3590.54 3740.31,3590.56 3739.59,3590.62 3738.86,3590.73 3738.14,3590.9 3737.4,3591.13 3736.66,3591.42 3735.9,3591.78 3735.13,3592.22 3734.35,3592.73 3733.54,3593.33 3732.71,3594.02

## Silkscreen, mask and mechanical layers (free items; w line width, h text height)
Top Silkscreen Layer:
  text "↑" at 3351.71,3234.55 h118.11
  text "IN" at 3378.52,3109.55 h118.11
Bottom Silkscreen Layer:
  text "北京守护兽科技有限公司" at 4707.43,5711.86 h59.06
Top Solder Mask Layer:
  region: 3886.04,3240.83 4119.05,3240.83 4119.05,5598.28 3886.04,5598.28
  region: 3805.9,4533.41 3926.48,4533.41 3926.48,4640.29 3805.9,4640.29
  region: 4101.18,4197.03 4221.76,4197.03 4221.76,4303.91 4101.18,4303.91
  region: 3805.21,3859.96 3925.79,3859.96 3925.79,3966.84 3805.21,3966.84
  region: 4099.12,3522.9 4219.7,3522.9 4219.7,3629.77 4099.12,3629.77
  region: 4105.29,4871.17 4225.87,4871.17 4225.87,4978.04 4105.29,4978.04
  region: 3805.61,5211.35 3926.19,5211.35 3926.19,5318.22 3805.61,5318.22